# Altium PCB SPT3G_LCBoardRev2.PcbDoc (part 3 of 3)
Units mil, origin at the board's own origin, x right, y up, seen from the top; angles counter-clockwise.
Board outline 7216.28 x 1969 mil, 6 copper layers (Top Layer, Signal Layer 1, Internal Plane 1, Internal Plane 2, Signal Layer 2, Bottom Layer), stack 61.6 mil thick; 29 components, 149 nets, 695 pads, 136 vias.
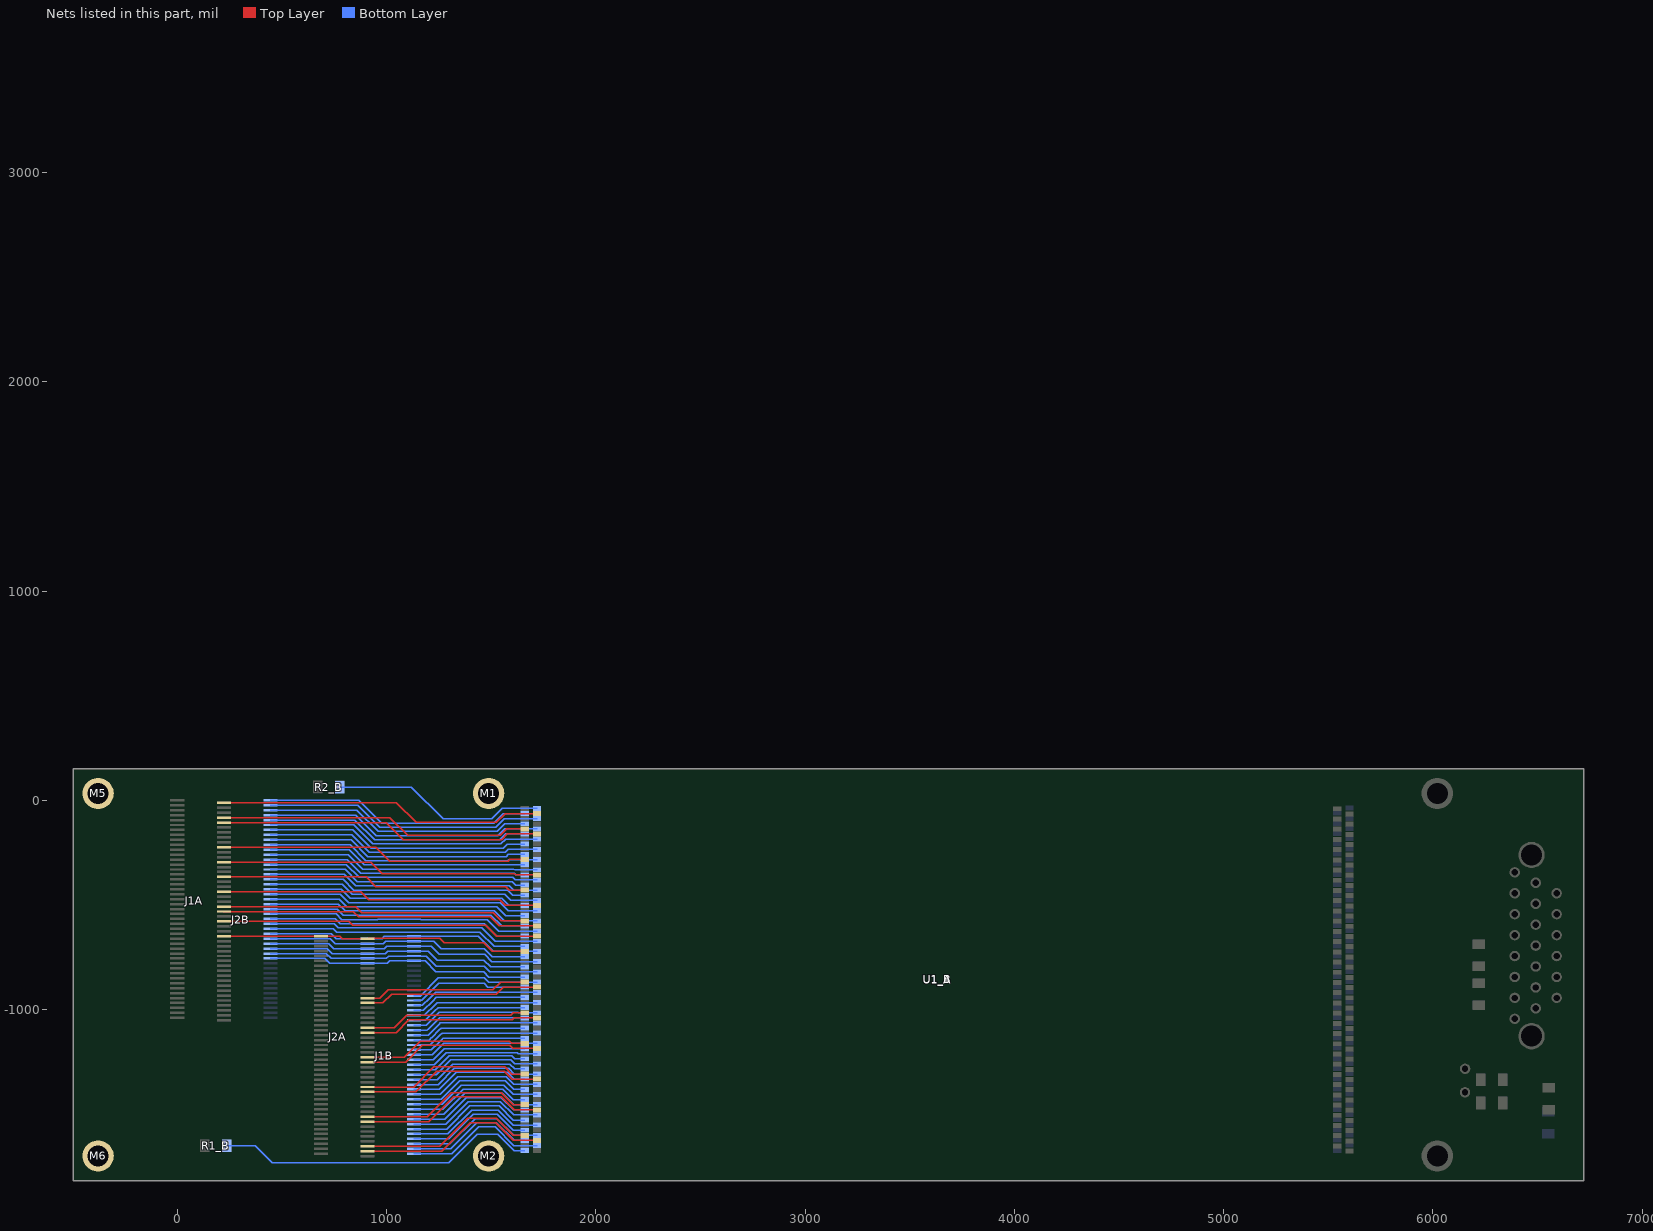
[diagram p7: the nets of this part, all layers, seen from the top]

## Via types
v1: diameter 20, hole 10, Top Layer to Bottom Layer, 136 vias

## Nets (pads, with @x,y where several pads share a name; then routed paths per layer and width w, separated by ;. In a path a pad name is that pad's centre, name@x,y a point inside that pad or via, vN(x,y) a via of type N, cw(c..) or ccw(c..) an arc to the next point about the centre after c; other vN are vias at no path point) (continued)
FREQA45: J1A.10 U1_A.6 | length 1542.1
  Top Layer w6: J1A.10@222.44,-106.3 999.23,-106.3 1081,-188.07 1462,-188.07 ; 1630,-160.87 U1_A.6@1719.4,-160.87
  Top Layer w6.01: 1462,-188.07 1550.58,-188.07 1577.78,-160.87 1630,-160.87
FREQA46: J2A.28 U1_A.36 | length 842.2
  Top Layer w6: J2A.28@908.43,-968.5 981.37,-968.5 1024.16,-925.71 1462,-925.71 ; 1630,-893.15 U1_A.36@1719.4,-893.15
  Top Layer w6.01: 1462,-925.71 1524.12,-925.71 1556.67,-893.15 1630,-893.15
FREQA47: J2A.40 U1_A.42 | length 840.2
  Top Layer w6: J2A.40@908.43,-1110.24 1045.4,-1110.24 1106.99,-1048.65 1462,-1048.65 ; 1630,-1039.61 U1_A.42@1719.4,-1039.61
  Top Layer w6.01: 1462,-1048.65 1600.76,-1048.65 1609.8,-1039.61 1630,-1039.61
FREQA48: J1A.38 U1_A.20 | length 1524.1
  Top Layer w6: J1A.38@222.44,-437.01 877.8,-437.01 915.72,-474.93 1462,-474.93 ; 1630,-502.6 U1_A.20@1719.4,-502.6
  Top Layer w6.01: 1462,-474.93 1539.85,-474.93 1567.53,-502.6 1630,-502.6
FREQA49: J2A.52 U1_A.48 | length 850.3
  Top Layer w6: J2A.52@908.43,-1251.97 1090.9,-1251.97 1171.28,-1171.59 1462,-1171.59 ; 1630,-1186.07 U1_A.48@1719.4,-1186.07
  Top Layer w6.01: 1462,-1171.59 1588.38,-1171.59 1602.86,-1186.07 1630,-1186.07
FREQA50: J1A.46 U1_A.24 | length 1525.4
  Top Layer w6: J1A.46@222.44,-531.5 841.68,-531.5 867.07,-556.89 1462,-556.89 ; 1630,-600.24 U1_A.24@1719.4,-600.24
  Top Layer w6.01: 1462,-556.89 1495.82,-556.89 1539.17,-600.24 1630,-600.24
FREQA51: J1A.2@222.44,-11.81 U1_A.2 | length 1553.8
  Top Layer w6: J1A.2@222.44,-11.81 1047.08,-11.81 1141.38,-106.11 1462,-106.11 ; 1630,-63.23 U1_A.2@1719.4,-63.23
  Top Layer w6.01: 1462,-106.11 1523.73,-106.11 1566.6,-63.23 1630,-63.23
FREQA52: J2A.64 U1_A.54 | length 867.8
  Top Layer w6: J2A.64@908.43,-1393.7 1139.65,-1393.7 1238.82,-1294.53 1462,-1294.53 ; 1630,-1332.52 U1_A.54@1719.4,-1332.52
  Top Layer w6.01: 1462,-1294.53 1563.3,-1294.53 1601.3,-1332.52 1630,-1332.52
FREQA53: J1A.50 U1_A.26 | length 1526.1
  Top Layer w6: J1A.50@222.44,-578.74 819.15,-578.74 837.99,-597.58 1462.35,-597.58 ; 1630,-649.06 U1_A.26@1719.4,-649.06
  Top Layer w6.01: 1462.35,-597.58 1474.23,-597.58 1525.71,-649.06 1630,-649.06
FREQA54: J2A.86 U1_A.65 | length 840.9
  Top Layer w6: J2A.86@908.43,-1653.54 1255.06,-1653.54 1388.67,-1519.92 1462,-1519.92 ; 1630,-1601.03 U1_A.65@1660.35,-1601.03
  Top Layer w6.01: 1462,-1519.92 1525.11,-1519.92 1606.21,-1601.03 1630,-1601.03
FREQA55: J1A.56 J2A.1 J2A.2@908.43,-661.42 U1_A.29 | length 1469.7
  Top Layer w6: J1A.56@222.44,-649.61 777.32,-649.61 789.13,-661.42 J2A.2@908.43,-661.42 910.5,-659.34 1254.06,-659.34 1275.57,-680.85 1462.35,-680.85 ; 1630,-722.29 U1_A.29@1660.35,-722.29
  Top Layer w6.01: 1462.35,-680.85 1463.72,-680.85 1505.16,-722.29 1630,-722.29
FREQA56: J2A.74 U1_A.59 | length 823.3
  Top Layer w6: J2A.74@908.43,-1511.81 1193.54,-1511.81 1308.37,-1396.98 1462,-1396.98 ; 1630,-1454.57 U1_A.59@1660.35,-1454.57
  Top Layer w6.01: 1462,-1396.98 1547.52,-1396.98 1605.11,-1454.57 1630,-1454.57
FREQA57: J2A.76 U1_A.60 | length 885.3
  Top Layer w6: J2A.76@908.43,-1535.43 1202.6,-1535.43 1320.56,-1417.47 1462,-1417.47 ; 1630,-1478.98 U1_A.60@1719.4,-1478.98
  Top Layer w6.01: 1462,-1417.47 1549.34,-1417.47 1610.85,-1478.98 1630,-1478.98
FREQA58: J1A.20 U1_A.11 | length 1468.4
  Top Layer w6: J1A.20@222.44,-224.41 949.38,-224.41 1015.49,-290.52 1462,-290.52 ; 1630,-282.92 U1_A.11@1660.35,-282.92
  Top Layer w6.01: 1462,-290.52 1582,-290.52 1589.6,-282.92 1630,-282.92
FREQA59: J1A.26 U1_A.14 | length 1522.2
  Top Layer w6: J1A.26@222.44,-295.28 923.46,-295.28 980.17,-351.99 1462,-351.99 ; 1630,-356.15 U1_A.14@1719.4,-356.15
  Top Layer w6.01: 1462,-351.99 1611.63,-351.99 1615.79,-356.15 1630,-356.15
FREQA60: J2A.50 U1_A.47 | length 788.3
  Top Layer w6: J2A.50@908.43,-1228.35 1084.52,-1228.35 1161.77,-1151.1 1462,-1151.1 ; 1630,-1161.66 U1_A.47@1660.35,-1161.66
  Top Layer w6.01: 1462,-1151.1 1587.01,-1151.1 1597.56,-1161.66 1630,-1161.66
FREQA61: J1A.32 U1_A.17 | length 1464.1
  Top Layer w6: J1A.32@222.44,-366.14 902.34,-366.14 949.66,-413.46 1462,-413.46 ; 1630,-429.37 U1_A.17@1660.35,-429.37
  Top Layer w6.01: 1462,-413.46 1570.02,-413.46 1585.93,-429.37 1630,-429.37
FREQA62: J2A.38 U1_A.41 | length 781.5
  Top Layer w6: J2A.38@908.43,-1086.61 1037.28,-1086.61 1095.73,-1028.16 1462,-1028.16 ; 1630,-1015.2 U1_A.41@1660.35,-1015.2
  Top Layer w6.01: 1462,-1028.16 1593.69,-1028.16 1606.65,-1015.2 1630,-1015.2
FREQA63: J2A.62 U1_A.53 | length 805.8
  Top Layer w6: J2A.62@908.43,-1370.08 1130.79,-1370.08 1226.83,-1274.04 1462,-1274.04 ; 1630,-1308.11 U1_A.53@1660.35,-1308.11
  Top Layer w6.01: 1462,-1274.04 1564.15,-1274.04 1598.22,-1308.11 1630,-1308.11
FREQA64: J2A.88 U1_A.66 | length 902.8
  Top Layer w6: J2A.88@908.43,-1677.17 1263.37,-1677.17 1400.12,-1540.41 1462,-1540.41 ; 1630,-1625.44 U1_A.66@1719.4,-1625.44
  Top Layer w6.01: 1462,-1540.41 1521.59,-1540.41 1606.62,-1625.44 1630,-1625.44
FREQA65: J1A.8 U1_A.5 | length 1718
  Top Layer w6: J1A.8@222.44,-82.68 1015.8,-82.68 1100.7,-167.58 1230,-167.58 ; 1630,-136.46 U1_A.5@1660.35,-136.46 ; 1230,-167.58 1462,-167.58 1230,-167.58
  Top Layer w6.01: 1462,-167.58 1543.15,-167.58 1574.27,-136.46 1630,-136.46
FREQA66: J1A.44 U1_A.23 | length 1466.1
  Top Layer w6: J1A.44@222.44,-507.87 852.66,-507.87 881.19,-536.4 1462,-536.4 ; 1630,-575.83 U1_A.23@1660.35,-575.83
  Top Layer w6.01: 1462,-536.4 1509.69,-536.4 1549.12,-575.83 1630,-575.83
FREQA67: J2A.26 U1_A.35 | length 783.5
  Top Layer w6: J2A.26@908.43,-944.88 967.64,-944.88 1007.3,-905.22 1462,-905.22 ; 1630,-868.74 U1_A.35@1660.35,-868.74
  Top Layer w6.01: 1462,-905.22 1508.6,-905.22 1545.08,-868.74 1630,-868.74
FREQB0: J2B.46 U1_B.45 | length 1249
  Bottom Layer w6: J2B.46@444.88,-519.69 764.99,-519.69 794.2,-548.9 1482.39,-548.9 ; 1630.09,-600.35 U1_B.45@1660.44,-600.35
  Bottom Layer w6.01: 1482.39,-548.9 1498.66,-548.9 1550.1,-600.35 1630.09,-600.35
FREQB1: J1B.89 J1B.90 J2B.36 U1_B.40 | length 1320.9
  Bottom Layer w6: J2B.36@444.88,-637.8 735.94,-637.8 759.56,-661.42 J1B.89@908.43,-661.42 ; J1B.89@910.5,-659.34 J1B.89@908.43,-661.42 ; J1B.90@1130.87,-649.61 1129.63,-650.84 989.23,-650.84 978.66,-661.42 J1B.89@908.43,-661.42 ; J1B.90@1131.91,-650.65 1245.37,-650.65 ; 1630.09,-722.39 U1_B.40@1719.5,-722.39
  Bottom Layer w6.01: 1245.37,-650.65 1437.75,-650.65 1509.5,-722.39 1630.09,-722.39
FREQB2: J1B.24 U1_B.13 | length 583.1
  Bottom Layer w6: J1B.24@1130.87,-1429.13 1260.42,-1429.13 1348.86,-1340.7 ; 1630.09,-1381.45 U1_B.13@1660.44,-1381.45
  Bottom Layer w6.01: 1348.86,-1340.7 1566.83,-1340.7 1607.58,-1381.45 1630.09,-1381.45
FREQB3: J1B.52 U1_B.27 | length 553.9
  Bottom Layer w6: J1B.52@1130.87,-1098.43 1194.54,-1098.43 1198.17,-1094.8 1198.77,-1094.8 1251.9,-1041.68 ; 1630.09,-1039.72 U1_B.27@1660.44,-1039.72
  Bottom Layer w6.01: 1251.9,-1041.68 1253.86,-1039.72 1630.09,-1039.72
FREQB4: J1B.64 U1_B.33 | length 570.9
  Bottom Layer w6: J1B.64@1130.87,-956.69 1167.18,-956.69 1248.73,-875.14 ; 1630.09,-893.26 U1_B.33@1660.44,-893.26
  Bottom Layer w6.01: 1248.73,-875.14 1466.09,-875.14 1484.21,-893.26 1630.09,-893.26
FREQB5: J2B.72 U1_B.58 | length 1308.7
  Bottom Layer w6: J2B.72@444.88,-212.6 825.59,-212.6 901.9,-288.9 1482.39,-288.9 ; 1630.09,-283.02 U1_B.58@1719.5,-283.02
  Bottom Layer w6.01: 1482.39,-288.9 1577.54,-288.9 1583.42,-283.02 1630.09,-283.02
FREQB6: J1B.30 U1_B.16 | length 632.2
  Bottom Layer w6: J1B.30@1130.87,-1358.27 1246.43,-1358.27 1324,-1280.7 ; 1630.09,-1308.22 U1_B.16@1719.5,-1308.22
  Bottom Layer w6.01: 1324,-1280.7 1583.74,-1280.7 1611.26,-1308.22 1630.09,-1308.22
FREQB7: J2B.84 U1_B.64 | length 1328.6
  Bottom Layer w6: J2B.84@444.88,-70.87 853.57,-70.87 951.6,-168.9 1482.39,-168.9 ; 1630.09,-136.57 U1_B.64@1719.5,-136.57
  Bottom Layer w6.01: 1482.39,-168.9 1532.31,-168.9 1564.65,-136.57 1630.09,-136.57
FREQB8: J1B.4 U1_B.3 | length 616.4
  Bottom Layer w6: J1B.4@1130.87,-1665.35 1307.04,-1665.35 1431.7,-1540.7 ; 1630.09,-1625.54 U1_B.3@1660.44,-1625.54
  Bottom Layer w6.01: 1431.7,-1540.7 1524.26,-1540.7 1609.11,-1625.54 1630.09,-1625.54
FREQB9: J1B.16 U1_B.9 | length 596.4
  Bottom Layer w6: J1B.16@1130.87,-1523.62 1279.07,-1523.62 1381.99,-1420.7 ; 1630.09,-1479.09 U1_B.9@1660.44,-1479.09
  Bottom Layer w6.01: 1381.99,-1420.7 1548.94,-1420.7 1607.33,-1479.09 1630.09,-1479.09
FREQB10: J2B.78 U1_B.61 | length 1259.6
  Bottom Layer w6: J2B.78@444.88,-141.73 839.58,-141.73 926.75,-228.9 1482.39,-228.9 ; 1630.09,-209.8 U1_B.61@1660.44,-209.8
  Bottom Layer w6.01: 1482.39,-228.9 1557.54,-228.9 1576.64,-209.8 1630.09,-209.8
FREQB11: J1B.83 J1B.84 J2B.30 U1_B.37 | length 1261.4
  Bottom Layer w6: J2B.30@444.88,-708.66 717.5,-708.66 741.12,-732.28 J1B.83@908.43,-732.28 993.12,-732.28 1004.93,-720.47 J1B.84@1130.87,-720.47 1199.42,-720.47 1243.06,-764.12 ; 1630.09,-795.62 U1_B.37@1660.44,-795.62
  Bottom Layer w6.01: 1243.06,-764.12 1465.32,-764.12 1496.82,-795.62 1630.09,-795.62
FREQB12: J1B.12 U1_B.7 | length 603
  Bottom Layer w6: J1B.12@1130.87,-1570.87 1288.39,-1570.87 1398.56,-1460.7 ; 1630.09,-1527.91 U1_B.7@1660.44,-1527.91
  Bottom Layer w6.01: 1398.56,-1460.7 1537.85,-1460.7 1605.05,-1527.91 1630.09,-1527.91
FREQB13: J1B.36 U1_B.19 | length 563.1
  Bottom Layer w6: J1B.36@1130.87,-1287.4 1232.45,-1287.4 1299.15,-1220.7 ; 1630.09,-1234.99 U1_B.19@1660.44,-1234.99
  Bottom Layer w6.01: 1299.15,-1220.7 1599.32,-1220.7 1613.62,-1234.99 1630.09,-1234.99
FREQB14: J2B.42 U1_B.43 | length 1249.2
  Bottom Layer w6: J2B.42@444.88,-566.93 755.66,-566.93 778.56,-589.83 965.39,-589.83 ; 965.61,-589.61 1155.72,-589.61 ; 1155.94,-589.83 1326.98,-589.83 ; 1630.09,-649.17 U1_B.43@1660.44,-649.17
  Bottom Layer w6.01: 1326.98,-589.83 1466.41,-589.83 1525.75,-649.17 1630.09,-649.17
FREQB15: J2B.54 U1_B.49 | length 1247.7
  Bottom Layer w6: J2B.54@444.88,-425.2 783.63,-425.2 827.34,-468.9 1482.39,-468.9 ; 1630.09,-502.71 U1_B.49@1660.44,-502.71
  Bottom Layer w6.01: 1482.39,-468.9 1549.99,-468.9 1583.79,-502.71 1630.09,-502.71
FREQB16: J1B.40 U1_B.21 | length 551.9
  Bottom Layer w6: J1B.40@1130.87,-1240.16 1222.52,-1240.16 1247.87,-1214.8 ; 1630.09,-1186.17 U1_B.21@1660.44,-1186.17
  Bottom Layer w6.01: 1247.87,-1214.8 1276.5,-1186.17 1630.09,-1186.17
FREQB17: J2B.66 U1_B.55 | length 1245.7
  Bottom Layer w6: J2B.66@444.88,-283.46 811.61,-283.46 877.05,-348.9 1482.39,-348.9 ; 1630.09,-356.25 U1_B.55@1660.44,-356.25
  Bottom Layer w6.01: 1482.39,-348.9 1609.81,-348.9 1617.16,-356.25 1630.09,-356.25
FREQB18: J1B.48 U1_B.25 | length 553.2
  Bottom Layer w6: J1B.48@1130.87,-1145.67 1203.87,-1145.67 1214.73,-1134.8 1215.34,-1134.8 1252.96,-1097.19 ; 1630.09,-1088.54 U1_B.25@1660.44,-1088.54
  Bottom Layer w6.01: 1252.96,-1097.19 1261.61,-1088.54 1630.09,-1088.54
FREQB19: J1B.60 U1_B.31 | length 555.2
  Bottom Layer w6: J1B.60@1130.87,-1003.94 1176.5,-1003.94 1220.87,-959.57 ; 1630.09,-942.08 U1_B.31@1660.44,-942.08
  Bottom Layer w6.01: 1220.87,-959.57 1238.36,-942.08 1630.09,-942.08
FREQB20: J2B.90 U1_B.67 | length 1279.5
  Bottom Layer w6: J2B.90@444.88,0 867.55,0 976.46,-108.9 1482.39,-108.9 ; 1630.09,-63.34 U1_B.67@1660.44,-63.34
  Bottom Layer w6.01: 1482.39,-108.9 1511.99,-108.9 1557.56,-63.34 1630.09,-63.34
FREQB21: J2B.58 U1_B.51 | length 1247
  Bottom Layer w6: J2B.58@444.88,-377.95 792.96,-377.95 843.91,-428.9 1482.39,-428.9 ; 1630.09,-453.89 U1_B.51@1660.44,-453.89
  Bottom Layer w6.01: 1482.39,-428.9 1578.28,-428.9 1603.27,-453.89 1630.09,-453.89
FREQB22: J1B.6 U1_B.4 | length 672.1
  Bottom Layer w6: J1B.6@1130.87,-1641.73 1302.38,-1641.73 1423.42,-1520.7 ; 1630.09,-1601.14 U1_B.4@1719.5,-1601.14
  Bottom Layer w6.01: 1423.42,-1520.7 1526.85,-1520.7 1607.29,-1601.14 1630.09,-1601.14
FREQB23: J1B.54 U1_B.28 | length 614.4
  Bottom Layer w6: J1B.54@1130.87,-1074.8 1190.49,-1074.8 1251.37,-1013.92 ; 1630.09,-1015.31 U1_B.28@1719.5,-1015.31
  Bottom Layer w6.01: 1251.37,-1013.92 1628.7,-1013.92 1630.09,-1015.31
FREQB24: J1B.18 U1_B.10 | length 652.1
  Bottom Layer w6: J1B.18@1130.87,-1500 1274.41,-1500 1373.71,-1400.7 ; 1630.09,-1454.68 U1_B.10@1719.5,-1454.68
  Bottom Layer w6.01: 1373.71,-1400.7 1553.68,-1400.7 1607.66,-1454.68 1630.09,-1454.68
FREQB25: J1B.28 U1_B.15 | length 576.4
  Bottom Layer w6: J1B.28@1130.87,-1381.89 1251.1,-1381.89 1332.29,-1300.7 ; 1630.09,-1332.63 U1_B.15@1660.44,-1332.63
  Bottom Layer w6.01: 1332.29,-1300.7 1579.54,-1300.7 1611.47,-1332.63 1630.09,-1332.63
FREQB26: J1B.87 J1B.88 J2B.34 U1_B.39 | length 1260.7
  Bottom Layer w6: J2B.34@444.88,-661.42 731.28,-661.42 754.9,-685.04 J1B.87@908.43,-685.04 983.42,-685.04 995.23,-673.23 J1B.88@1130.87,-673.23 1226.41,-673.23 1261.79,-708.61 ; 1630.09,-746.8 U1_B.39@1660.44,-746.8
  Bottom Layer w6.01: 1261.79,-708.61 1467.07,-708.61 1505.27,-746.8 1630.09,-746.8
FREQB27: J2B.82 U1_B.63 | length 1266.2
  Bottom Layer w6: J2B.82@444.88,-94.49 848.91,-94.49 943.32,-188.9 1482.39,-188.9 ; 1630.09,-160.98 U1_B.63@1660.44,-160.98
  Bottom Layer w6.01: 1482.39,-188.9 1541.45,-188.9 1569.38,-160.98 1630.09,-160.98
FREQB28: J1B.66 U1_B.34 | length 633
  Bottom Layer w6: J1B.66@1130.87,-933.07 1162.52,-933.07 1248.2,-847.39 ; 1630.09,-868.85 U1_B.34@1719.5,-868.85
  Bottom Layer w6.01: 1248.2,-847.39 1467.69,-847.39 1489.16,-868.85 1630.09,-868.85
FREQB29: J2B.48 U1_B.46 | length 1307.7
  Bottom Layer w6: J2B.48@444.88,-496.06 769.65,-496.06 802.49,-528.9 1482.39,-528.9 ; 1630.09,-575.94 U1_B.46@1719.5,-575.94
  Bottom Layer w6.01: 1482.39,-528.9 1515.24,-528.9 1562.27,-575.94 1630.09,-575.94
FREQB30: J2B.70 U1_B.57 | length 1244.2
  Bottom Layer w6: J2B.70@444.88,-236.22 820.93,-236.22 893.61,-308.9 1482.39,-308.9 ; 1630.09,-307.43 U1_B.57@1660.44,-307.43
  Bottom Layer w6.01: 1482.39,-308.9 1628.62,-308.9
FREQB31: J1B.42 U1_B.22 | length 611.3
  Bottom Layer w6: J1B.42@1130.87,-1216.54 1217.85,-1216.54 1239.59,-1194.8 ; 1272.62,-1161.77 U1_B.22@1719.5,-1161.77
  Bottom Layer w6.01: 1239.59,-1194.8 1272.62,-1161.77
FREQB32: J2B.60 U1_B.52 | length 1305.7
  Bottom Layer w6: J2B.60@444.88,-354.33 797.62,-354.33 852.19,-408.9 1482.39,-408.9 ; 1630.09,-429.48 U1_B.52@1719.5,-429.48
  Bottom Layer w6.01: 1482.39,-408.9 1586.97,-408.9 1607.55,-429.48 1630.09,-429.48
FREQB33: R1_B.2 U1_B.1 | length 1546
  Bottom Layer w6: R1_B.2@237.39,-1650.63 373.33,-1650.63 454.57,-1731.87 1297.1,-1731.87 1433.61,-1595.35 ; 1630.09,-1674.36 U1_B.1@1660.44,-1674.36
  Bottom Layer w6.01: 1433.61,-1595.35 1530.51,-1595.35 1609.52,-1674.36 1630.09,-1674.36
FREQB34: R2_B.2 U1_B.68 | length 1026.1
  Bottom Layer w6: R2_B.2@777.1,63.2 1119.29,63.2 1271.4,-88.9 ; 1630.09,-38.93 U1_B.68@1719.5,-38.93
  Bottom Layer w6.01: 1271.4,-88.9 1503.65,-88.9 1553.62,-38.93 1630.09,-38.93
FREQB35: J1B.22 U1_B.12 | length 645.5
  Bottom Layer w6: J1B.22@1130.87,-1452.76 1265.08,-1452.76 1357.14,-1360.7 ; 1630.09,-1405.86 U1_B.12@1719.5,-1405.86
  Bottom Layer w6.01: 1357.14,-1360.7 1560.47,-1360.7 1605.63,-1405.86 1630.09,-1405.86
FREQB36: J1B.85 J1B.86 J2B.32 U1_B.38 | length 1320.1
  Bottom Layer w6: J2B.32@444.88,-685.04 723.17,-685.04 746.79,-708.66 J1B.85@908.43,-708.66 988.46,-708.66 1000.27,-696.85 1213.1,-696.85 1252.61,-736.36 ; 1630.09,-771.21 U1_B.38@1719.5,-771.21
  Bottom Layer w6.01: 1252.61,-736.36 1469.06,-736.36 1503.91,-771.21 1630.09,-771.21
FREQB37: J1B.34 U1_B.18 | length 625.5
  Bottom Layer w6: J1B.34@1130.87,-1311.02 1237.11,-1311.02 1307.44,-1240.7 ; 1630.09,-1259.4 U1_B.18@1719.5,-1259.4
  Bottom Layer w6.01: 1307.44,-1240.7 1594.23,-1240.7 1612.94,-1259.4 1630.09,-1259.4
FREQB38: J2B.44 U1_B.44 | length 1308.5
  Bottom Layer w6: J2B.44@444.88,-543.31 760.32,-543.31 786.84,-569.83 957.11,-569.83 957.33,-569.61 1164,-569.61 1164.22,-569.83 1482.39,-569.83 ; 1630.09,-624.76 U1_B.44@1719.5,-624.76
  Bottom Layer w6.01: 1482.39,-569.83 1537.32,-624.76 1630.09,-624.76
FREQB39: J1B.14 U1_B.8 | length 658.8
  Bottom Layer w6: J1B.14@1130.87,-1547.24 1283.73,-1547.24 1390.28,-1440.7 ; 1630.09,-1503.5 U1_B.8@1719.5,-1503.5
  Bottom Layer w6.01: 1390.28,-1440.7 1544.2,-1440.7 1607,-1503.5 1630.09,-1503.5
FREQB40: J1B.62 U1_B.32 | length 614.6
  Bottom Layer w6: J1B.62@1130.87,-980.31 1171.84,-980.31 1206.72,-945.43 ; 1630.09,-917.67 U1_B.32@1719.5,-917.67
  Bottom Layer w6.01: 1206.72,-945.43 1234.48,-917.67 1630.09,-917.67
FREQB41: J2B.68 U1_B.56 | length 1304.4
  Bottom Layer w6: J2B.68@444.88,-259.84 816.27,-259.84 885.33,-328.9 1482.39,-328.9 ; 1630.09,-331.84 U1_B.56@1719.5,-331.84
  Bottom Layer w6.01: 1482.39,-328.9 1608.8,-328.9 1611.74,-331.84 1630.09,-331.84
FREQB42: J2B.80 U1_B.62 | length 1322
  Bottom Layer w6: J2B.80@444.88,-118.11 844.24,-118.11 935.04,-208.9 1482.39,-208.9 ; 1630.09,-185.39 U1_B.62@1719.5,-185.39
  Bottom Layer w6.01: 1482.39,-208.9 1546.42,-208.9 1569.94,-185.39 1630.09,-185.39
FREQB43: J1B.58 U1_B.30 | length 613.9
  Bottom Layer w6: J1B.58@1130.87,-1027.56 1181.16,-1027.56 1235.01,-973.71 ; 1630.09,-966.49 U1_B.30@1719.5,-966.49
  Bottom Layer w6.01: 1235.01,-973.71 1242.23,-966.49 1630.09,-966.49
FREQB44: J2B.56 U1_B.50 | length 1306.4
  Bottom Layer w6: J2B.56@444.88,-401.57 788.3,-401.57 835.63,-448.9 1482.39,-448.9 ; 1630.09,-478.3 U1_B.50@1719.5,-478.3
  Bottom Layer w6.01: 1482.39,-448.9 1563.93,-448.9 1593.33,-478.3 1630.09,-478.3
FREQB45: J1B.10 U1_B.6 | length 665.4
  Bottom Layer w6: J1B.10@1130.87,-1594.49 1293.06,-1594.49 1406.85,-1480.7 ; 1630.09,-1552.32 U1_B.6@1719.5,-1552.32
  Bottom Layer w6.01: 1406.85,-1480.7 1534.18,-1480.7 1605.8,-1552.32 1630.09,-1552.32
FREQB46: J1B.81 J1B.82 J2B.28 U1_B.36 | length 1320.7
  Bottom Layer w6: J2B.28@444.88,-732.28 712.33,-732.28 735.95,-755.91 997.78,-755.91 1009.59,-744.09 1190.45,-744.09 1238.23,-791.87 ; 1630.09,-820.03 U1_B.36@1719.5,-820.03
  Bottom Layer w6.01: 1238.23,-791.87 1465.87,-791.87 1494.03,-820.03 1630.09,-820.03
FREQB47: J2B.40 U1_B.42 | length 1308.9
  Bottom Layer w6: J2B.40@444.88,-590.55 751,-590.55 770.28,-609.83 973.68,-609.83 973.9,-609.61 1147.43,-609.61 ; 1147.66,-609.83 1301.54,-609.83 ; 1630.09,-673.58 U1_B.42@1719.5,-673.58
  Bottom Layer w6.01: 1301.54,-609.83 1454.91,-609.83 1518.66,-673.58 1630.09,-673.58
FREQB48: J1B.38 U1_B.20 | length 614.6
  Bottom Layer w6: J1B.38@1130.87,-1263.78 1227.18,-1263.78 1256.16,-1234.8 ; 1630.09,-1210.58 U1_B.20@1719.5,-1210.58
  Bottom Layer w6.01: 1256.16,-1234.8 1285.14,-1205.82 1625.33,-1205.82 1630.09,-1210.58
FREQB49: J2B.52 U1_B.48 | length 1307
  Bottom Layer w6: J2B.52@444.88,-448.82 778.97,-448.82 819.06,-488.9 1482.39,-488.9 ; 1630.09,-527.12 U1_B.48@1719.5,-527.12
  Bottom Layer w6.01: 1482.39,-488.9 1542.51,-488.9 1580.73,-527.12 1630.09,-527.12
FREQB50: J1B.46 U1_B.24 | length 612
  Bottom Layer w6: J1B.46@1130.87,-1169.29 1208.53,-1169.29 1223.02,-1154.8 1223.63,-1154.8 1257.73,-1120.7 ; 1630.09,-1112.95 U1_B.24@1719.5,-1112.95
  Bottom Layer w6.01: 1257.73,-1120.7 1265.48,-1112.95 1630.09,-1112.95
FREQB51: J1B.2@1130.87,-1688.98 U1_B.2 | length 678.7
  Bottom Layer w6: J1B.2@1130.87,-1688.98 1311.71,-1688.98 1439.98,-1560.7 ; 1630.09,-1649.95 U1_B.2@1719.5,-1649.95
  Bottom Layer w6.01: 1439.98,-1560.7 1519.52,-1560.7 1608.78,-1649.95 1630.09,-1649.95
FREQB52: J2B.64 U1_B.54 | length 1305.1
  Bottom Layer w6: J2B.64@444.88,-307.09 806.95,-307.09 868.76,-368.9 1482.39,-368.9 ; 1630.09,-380.66 U1_B.54@1719.5,-380.66
  Bottom Layer w6.01: 1482.39,-368.9 1603.54,-368.9 1615.3,-380.66 1630.09,-380.66
FREQB53: J1B.50 U1_B.26 | length 612.6
  Bottom Layer w6: J1B.50@1130.87,-1122.05 1199.21,-1122.05 1206.45,-1114.8 1207.06,-1114.8 1252.43,-1069.43 ; 1630.09,-1064.13 U1_B.26@1719.5,-1064.13
  Bottom Layer w6.01: 1252.43,-1069.43 1257.73,-1064.13 1630.09,-1064.13
FREQB54: J2B.86 U1_B.65 | length 1272.9
  Bottom Layer w6: J2B.86@444.88,-47.24 858.23,-47.24 959.89,-148.9 1482.39,-148.9 ; 1630.09,-112.16 U1_B.65@1660.44,-112.16
  Bottom Layer w6.01: 1482.39,-148.9 1528.69,-148.9 1565.44,-112.16 1630.09,-112.16
FREQB55: J1B.56 U1_B.29 | length 554.5
  Bottom Layer w6: J1B.56@1130.87,-1051.18 1185.83,-1051.18 1231.43,-1005.57 ; 1630.09,-990.9 U1_B.29@1660.44,-990.9
  Bottom Layer w6.01: 1231.43,-1005.57 1246.11,-990.9 1630.09,-990.9
FREQB56: J2B.74 U1_B.59 | length 1252.9
  Bottom Layer w6: J2B.74@444.88,-188.98 830.26,-188.98 910.18,-268.9 1482.39,-268.9 ; 1630.09,-258.62 U1_B.59@1660.44,-258.62
  Bottom Layer w6.01: 1482.39,-268.9 1572.09,-268.9 1582.38,-258.62 1630.09,-258.62
FREQB57: J2B.76 U1_B.60 | length 1315.3
  Bottom Layer w6: J2B.76@444.88,-165.35 834.92,-165.35 918.47,-248.9 1482.39,-248.9 ; 1630.09,-234.21 U1_B.60@1719.5,-234.21
  Bottom Layer w6.01: 1482.39,-248.9 1566.23,-248.9 1580.92,-234.21 1630.09,-234.21
FREQB58: J1B.20 U1_B.11 | length 589.7
  Bottom Layer w6: J1B.20@1130.87,-1476.38 1269.75,-1476.38 1365.43,-1380.7 ; 1630.09,-1430.27 U1_B.11@1660.44,-1430.27
  Bottom Layer w6.01: 1365.43,-1380.7 1555.73,-1380.7 1605.3,-1430.27 1630.09,-1430.27
FREQB59: J1B.26 U1_B.14 | length 638.8
  Bottom Layer w6: J1B.26@1130.87,-1405.51 1255.76,-1405.51 1340.57,-1320.7 ; 1630.09,-1357.04 U1_B.14@1719.5,-1357.04
  Bottom Layer w6.01: 1340.57,-1320.7 1571.03,-1320.7 1607.37,-1357.04 1630.09,-1357.04
FREQB60: J2B.50 U1_B.47 | length 1248.3
  Bottom Layer w6: J2B.50@444.88,-472.44 774.31,-472.44 810.77,-508.9 1482.39,-508.9 ; 1630.09,-551.53 U1_B.47@1660.44,-551.53
  Bottom Layer w6.01: 1482.39,-508.9 1526.14,-508.9 1568.77,-551.53 1630.09,-551.53
FREQB61: J1B.32 U1_B.17 | length 569.8
  Bottom Layer w6: J1B.32@1130.87,-1334.65 1241.77,-1334.65 1315.72,-1260.7 ; 1630.09,-1283.81 U1_B.17@1660.44,-1283.81
  Bottom Layer w6.01: 1315.72,-1260.7 1589.55,-1260.7 1612.67,-1283.81 1630.09,-1283.81
FREQB62: J2B.38 U1_B.41 | length 1250.1
  Bottom Layer w6: J2B.38@444.88,-614.17 746.34,-614.17 761.99,-629.83 981.96,-629.83 982.18,-629.61 1139.15,-629.61 ; 1139.37,-629.83 1276.09,-629.83 ; 1630.09,-697.99 U1_B.41@1660.44,-697.99
  Bottom Layer w6.01: 1276.09,-629.83 1446.28,-629.83 1514.44,-697.99 1630.09,-697.99
FREQB63: J2B.62 U1_B.53 | length 1246.4
  Bottom Layer w6: J2B.62@444.88,-330.71 802.28,-330.71 860.48,-388.9 1482.39,-388.9 ; 1630.09,-405.07 U1_B.53@1660.44,-405.07
  Bottom Layer w6.01: 1482.39,-388.9 1600.91,-388.9 1617.08,-405.07 1630.09,-405.07
FREQB64: J2B.88 U1_B.66 | length 1335.3
  Bottom Layer w6: J2B.88@444.88,-23.62 862.89,-23.62 968.17,-128.9 1482.39,-128.9 ; 1630.09,-87.75 U1_B.66@1719.5,-87.75
  Bottom Layer w6.01: 1482.39,-128.9 1521.13,-128.9 1562.28,-87.75 1630.09,-87.75
FREQB65: J1B.8 U1_B.5 | length 609.7
  Bottom Layer w6: J1B.8@1130.87,-1618.11 1297.72,-1618.11 1415.13,-1500.7 ; 1630.09,-1576.73 U1_B.5@1660.44,-1576.73
  Bottom Layer w6.01: 1415.13,-1500.7 1528.36,-1500.7 1604.39,-1576.73 1630.09,-1576.73
FREQB66: J1B.44 U1_B.23 | length 552.6
  Bottom Layer w6: J1B.44@1130.87,-1192.91 1213.19,-1192.91 1231.3,-1174.8 1231.91,-1174.8 1266.02,-1140.7 ; 1630.09,-1137.36 U1_B.23@1660.44,-1137.36
  Bottom Layer w6.01: 1266.02,-1140.7 1269.36,-1137.36 1630.09,-1137.36
FREQB67: J1B.79 J1B.80 J2B.26 U1_B.35 | length 1262
  Bottom Layer w6: J2B.26@444.88,-755.91 704.13,-755.91 727.75,-779.53 J1B.79@908.43,-779.53 1004.43,-779.53 1016.24,-767.72 J1B.80@1130.87,-767.72 1184.37,-767.72 1236.29,-819.63 ; 1630.09,-844.44 U1_B.35@1660.44,-844.44
  Bottom Layer w6.01: 1236.29,-819.63 1463.56,-819.63 1488.37,-844.44 1630.09,-844.44
GND: M1.0 M2.0 M5.0 M6.0
pads on no net: J1.1 J1.2 J1.3 J1.4 J1.5 J1.6 J1.9 J1.10 J1.11 J1.12 J1.13 J1.14 J1.15 J1.16 J1.17 J1.20 J1.21 J1.MH1 J1.MH2 J1A.2@-61.02,90.55 J1A.67 J1A.68 J1A.69 J1A.70 J1A.71 J1A.72 J1A.73 J1A.74 J1A.75 J1A.76 J1A.77 J1A.78 J1A.79 J1A.80 J1A.81 J1A.82 J1A.83 J1A.84 J1A.85 J1A.86 J1A.87 J1A.88 J1A.89 J1A.90 J1B.2@847.4,-1791.34 J1B.67 J1B.68 J1B.69 J1B.70 J1B.71 J1B.72 J1B.73 J1B.74 J1B.75 J1B.76 J1B.77 J1B.78 J2A.2@624.96,-559.06 J2A.13 J2A.14 J2A.15 J2A.16 J2A.17 J2A.18 J2A.19 J2A.20 J2A.21 J2A.22 J2A.23 J2A.24 J2B.1 J2B.2 J2B.3 J2B.4 J2B.5 J2B.6 J2B.7 J2B.8 J2B.9 J2B.10 J2B.11 J2B.12 J2B.13 J2B.14 J2B.15 J2B.16 J2B.17 J2B.18 J2B.19 J2B.20 J2B.21 J2B.22 J2B.23 J2B.24 M3.0 M4.0

## Polygon pours and split planes (outlines as drawn)
COMB_A on Top Layer "Top Layer-No Net" (solid, pour order 11): 5632.04,-1675.33 ccw(c5705.99,-1645.35) 5735.97,-1719.31 5736.22,-1719.63 ccw(c5088.38,-858.01) 5736.22,3.61 5735.97,3.28 ccw(c5705.99,-70.67) 5632.04,-40.69
BOLORETURN_A on Signal Layer 1 "Top Layer-No Net" (solid, pour order 15): 5632.04,-1675.33 ccw(c5705.99,-1645.35) 5735.97,-1719.31 5736.22,-1719.63 ccw(c5088.38,-858.01) 5736.22,3.61 5735.97,3.28 ccw(c5705.99,-70.67) 5632.04,-40.69
BOLORETURN_B on Signal Layer 2 "Top Layer-No Net" (solid, pour order 13): 5632.04,-1675.33 ccw(c5705.99,-1645.35) 5735.97,-1719.31 5736.22,-1719.63 ccw(c5088.38,-858.01) 5736.22,3.61 5735.97,3.28 ccw(c5705.99,-70.67) 5632.04,-40.69
COMB_B on Bottom Layer "Top Layer-No Net" (solid): 5632.04,-1675.33 ccw(c5705.99,-1645.35) 5735.97,-1719.31 5736.22,-1719.63 ccw(c5088.38,-858.01) 5736.22,3.61 5735.97,3.28 ccw(c5705.99,-70.67) 5632.04,-40.69
GND on Internal Plane 1 (split plane): 6699.8,-1798.41 -476.28,-1798.41 -476.28,130.4 6699.8,130.4
GND on Internal Plane 2 (split plane): 6699.8,-1798.41 -476.28,-1798.41 -476.28,130.4 6699.8,130.4

## Keep-outs
Keep-Out Layer:
  lines w1: 2238.61,378.44 3489.25,1629.08 ; 2238.61,438.44 3429.25,1629.08 ; 2238.61,498.44 3369.25,1629.08 ; 2238.61,558.44 3309.25,1629.08 ; 2238.61,618.44 3249.25,1629.08 ; 2238.61,678.44 3189.25,1629.08 ; 2238.61,738.44 3129.25,1629.08 ; 2238.61,798.44 3069.25,1629.08 ; 2238.61,858.44 3009.25,1629.08 ; 2238.61,918.44 2949.25,1629.08 ; 2238.61,978.44 2889.25,1629.08 ; 2238.61,1038.44 2829.25,1629.08 ; 2238.61,1098.44 2769.25,1629.08 ; 2238.61,1158.44 2709.25,1629.08 ; 2238.61,1218.44 2649.25,1629.08 ; 2238.61,1278.44 2589.25,1629.08 ; 2238.61,1338.44 2529.25,1629.08 ; 2238.61,1398.44 2469.25,1629.08 ; 2238.61,1458.44 2409.25,1629.08 ; 2238.61,1518.44 2349.25,1629.08 ; 2238.61,1578.44 2289.25,1629.08 ; 2266.84,346.67 3549.25,1629.08 ; 2326.84,346.67 3609.25,1629.08 ; 2386.84,346.67 3669.25,1629.08 ; 2446.84,346.67 3729.25,1629.08 ; 2506.84,346.67 3789.25,1629.08 ; 2566.84,346.67 3849.25,1629.08 ; 2626.84,346.67 3909.25,1629.08 ; 2686.84,346.67 3969.25,1629.08 ; 2746.84,346.67 4029.25,1629.08 ; 2806.84,346.67 4089.25,1629.08 ; 2866.84,346.67 4149.25,1629.08 ; 2926.84,346.67 4209.25,1629.08 ; 2986.84,346.67 4269.25,1629.08 ; 3046.84,346.67 4329.25,1629.08 ; 3106.84,346.67 4389.25,1629.08 ; 3166.84,346.67 4449.25,1629.08 ; 3226.84,346.67 4509.25,1629.08 ; 3286.84,346.67 4569.25,1629.08 ; 3346.84,346.67 4629.25,1629.08 ; 3406.84,346.67 4689.25,1629.08 ; 3466.84,346.67 4749.25,1629.08 ; 3526.84,346.67 4809.25,1629.08 ; 3586.84,346.67 4869.25,1629.08 ; 3646.84,346.67 4929.25,1629.08 ; 3706.84,346.67 4989.25,1629.08 ; 3766.84,346.67 5049.25,1629.08 ; 3826.84,346.67 5109.25,1629.08 ; 3886.84,346.67 5169.25,1629.08 ; 3946.84,346.67 5229.25,1629.08 ; 4006.84,346.67 5289.25,1629.08 ; 4066.84,346.67 5349.25,1629.08 ; 4126.84,346.67 5409.25,1629.08 ; 4186.84,346.67 5469.25,1629.08 ; 4246.84,346.67 5529.25,1629.08 ; 4306.84,346.67 5589.25,1629.08 ; 4366.84,346.67 5649.25,1629.08 ; 4426.84,346.67 5709.25,1629.08 ; 4486.84,346.67 5769.25,1629.08 ; 4546.84,346.67 5829.25,1629.08 ; 4606.84,346.67 5889.25,1629.08 ; 4666.84,346.67 5949.25,1629.08 ; 4726.84,346.67 6009.25,1629.08 ; 4786.84,346.67 6069.25,1629.08 ; 4846.84,346.67 6129.25,1629.08 ; 4906.84,346.67 6189.25,1629.08 ; 4966.84,346.67 6249.25,1629.08 ; 5026.84,346.67 6309.25,1629.08 ; 5086.84,346.67 6369.25,1629.08 ; 5146.84,346.67 6429.25,1629.08 ; 5206.84,346.67 6489.25,1629.08 ; 5266.84,346.67 6549.25,1629.08 ; 5326.84,346.67 6609.25,1629.08 ; 5386.84,346.67 6669.25,1629.08 ; 5446.84,346.67 6729.25,1629.08 ; 5506.84,346.67 6789.25,1629.08 ; 5566.84,346.67 6849.25,1629.08 ; 5626.84,346.67 6887.38,1607.21 ; 5686.84,346.67 6887.38,1547.21 ; 5746.84,346.67 6887.38,1487.21 ; 5767.7,1678.86 5867.38,1778.54 5987.38,1898.54 6107.38,2018.54 6227.38,2138.54 6347.38,2258.54 6467.38,2378.54 6587.38,2498.54 6707.38,2618.54 6827.38,2738.54 6887.38,2798.54 ; 5767.7,1738.86 5807.38,1778.54 5927.38,1898.54 6047.38,2018.54 6167.38,2138.54 6287.38,2258.54 6407.38,2378.54 6527.38,2498.54 6647.38,2618.54 6767.38,2738.54 6887.38,2858.54 ; 5767.7,1798.86 5867.38,1898.54 5987.38,2018.54 6107.38,2138.54 6227.38,2258.54 6347.38,2378.54 6467.38,2498.54 6587.38,2618.54 6707.38,2738.54 6827.38,2858.54 6887.38,2918.54 ; 5767.7,1858.86 5807.38,1898.54 5927.38,2018.54 6047.38,2138.54 6167.38,2258.54 6287.38,2378.54 6407.38,2498.54 6527.38,2618.54 6647.38,2738.54 6767.38,2858.54 6887.38,2978.54 ; 5767.7,1918.86 5867.38,2018.54 5987.38,2138.54 6107.38,2258.54 6227.38,2378.54 6347.38,2498.54 6467.38,2618.54 6587.38,2738.54 6707.38,2858.54 6827.38,2978.54 6887.38,3038.54 ; 5767.7,1978.86 5807.38,2018.54 5927.38,2138.54 6047.38,2258.54 6167.38,2378.54 6287.38,2498.54 6407.38,2618.54 6527.38,2738.54 6647.38,2858.54 6767.38,2978.54 6887.38,3098.54 ; 5767.7,2038.86 5867.38,2138.54 5987.38,2258.54 6107.38,2378.54 6227.38,2498.54 6347.38,2618.54 6467.38,2738.54 6587.38,2858.54 6707.38,2978.54 6827.38,3098.54 6887.38,3158.54 ; 5767.7,2098.86 5807.38,2138.54 5927.38,2258.54 6047.38,2378.54 6167.38,2498.54 6287.38,2618.54 6407.38,2738.54 6527.38,2858.54 6647.38,2978.54 6767.38,3098.54 6887.38,3218.54 ; 5767.7,2158.86 5867.38,2258.54 5987.38,2378.54 6107.38,2498.54 6227.38,2618.54 6347.38,2738.54 6467.38,2858.54 6587.38,2978.54 6707.38,3098.54 6827.38,3218.54 6887.38,3278.54 ; 5767.7,2218.86 5807.38,2258.54 5927.38,2378.54 6047.38,2498.54 6167.38,2618.54 6287.38,2738.54 6407.38,2858.54 6527.38,2978.54 6647.38,3098.54 6767.38,3218.54 6887.38,3338.54 ; 5767.7,2278.86 5867.38,2378.54 5987.38,2498.54 6107.38,2618.54 6227.38,2738.54 6347.38,2858.54 6467.38,2978.54 6587.38,3098.54 6707.38,3218.54 6827.38,3338.54 6887.38,3398.54 ; 5767.7,2338.86 5807.38,2378.54 5927.38,2498.54 6047.38,2618.54 6167.38,2738.54 6287.38,2858.54 6407.38,2978.54 6527.38,3098.54 6647.38,3218.54 6767.38,3338.54 6887.38,3458.54 ; 5767.7,2398.86 5867.38,2498.54 5987.38,2618.54 6107.38,2738.54 6227.38,2858.54 6347.38,2978.54 6467.38,3098.54 6587.38,3218.54 6707.38,3338.54 6827.38,3458.54 ; 5767.7,2458.86 5807.38,2498.54 5927.38,2618.54 6047.38,2738.54 6167.38,2858.54 6287.38,2978.54 6407.38,3098.54 6527.38,3218.54 6647.38,3338.54 6767.38,3458.54 ; 5767.7,2518.86 5867.38,2618.54 5987.38,2738.54 6107.38,2858.54 6227.38,2978.54 6347.38,3098.54 6467.38,3218.54 6587.38,3338.54 6707.38,3458.54 ; 5767.7,2578.86 5807.38,2618.54 5927.38,2738.54 6047.38,2858.54 6167.38,2978.54 6287.38,3098.54 6407.38,3218.54 6527.38,3338.54 6647.38,3458.54 ; 5767.7,2638.86 5867.38,2738.54 5987.38,2858.54 6107.38,2978.54 6227.38,3098.54 6347.38,3218.54 6467.38,3338.54 6587.38,3458.54 ; 5767.7,2698.86 5807.38,2738.54 5927.38,2858.54 6047.38,2978.54 6167.38,3098.54 6287.38,3218.54 6407.38,3338.54 6527.38,3458.54 ; 5767.7,2758.86 5867.38,2858.54 5987.38,2978.54 6107.38,3098.54 6227.38,3218.54 6347.38,3338.54 6467.38,3458.54 ; 5767.7,2818.86 5807.38,2858.54 5927.38,2978.54 6047.38,3098.54 6167.38,3218.54 6287.38,3338.54 6407.38,3458.54 ; 5767.7,2878.86 5867.38,2978.54 5987.38,3098.54 6107.38,3218.54 6227.38,3338.54 6347.38,3458.54 ; 5767.7,2938.86 5807.38,2978.54 5927.38,3098.54 6047.38,3218.54 6167.38,3338.54 6287.38,3458.54 ; 5767.7,2998.86 5867.38,3098.54 5987.38,3218.54 6107.38,3338.54 6227.38,3458.54 ; 5767.7,3058.86 5807.38,3098.54 5927.38,3218.54 6047.38,3338.54 6167.38,3458.54 ; 5767.7,3118.86 5867.38,3218.54 5987.38,3338.54 6107.38,3458.54 ; 5767.7,3178.86 5807.38,3218.54 5927.38,3338.54 6047.38,3458.54 ; 5767.7,3238.86 5867.38,3338.54 5987.38,3458.54 ; 5767.7,3298.86 5807.38,3338.54 5927.38,3458.54 ; 5767.7,3358.86 5867.38,3458.54 ; 5767.7,3418.86 5807.38,3458.54 ; 5806.84,346.67 6887.38,1427.21 ; 5807.38,1658.54 5927.38,1778.54 6047.38,1898.54 6167.38,2018.54 6287.38,2138.54 6407.38,2258.54 6527.38,2378.54 6647.38,2498.54 6767.38,2618.54 6887.38,2738.54 ; 5866.84,346.67 6887.38,1367.21 ; 5867.38,1658.54 5987.38,1778.54 6107.38,1898.54 6227.38,2018.54 6347.38,2138.54 6467.38,2258.54 6587.38,2378.54 6707.38,2498.54 6827.38,2618.54 6887.38,2678.54 ; 5926.84,346.67 6887.38,1307.21 ; 5927.38,1658.54 6047.38,1778.54 6167.38,1898.54 6287.38,2018.54 6407.38,2138.54 6527.38,2258.54 6647.38,2378.54 6767.38,2498.54 6887.38,2618.54 ; 5986.84,346.67 6887.38,1247.21 ; 5987.38,1658.54 6107.38,1778.54 6227.38,1898.54 6347.38,2018.54 6467.38,2138.54 6587.38,2258.54 6707.38,2378.54 6827.38,2498.54 6887.38,2558.54 ; 6046.84,346.67 6887.38,1187.21 ; 6047.38,1658.54 6167.38,1778.54 6287.38,1898.54 6407.38,2018.54 6527.38,2138.54 6647.38,2258.54 6767.38,2378.54 6887.38,2498.54 ; 6106.84,346.67 6887.38,1127.21 ; 6107.38,1658.54 6227.38,1778.54 6347.38,1898.54 6467.38,2018.54 6587.38,2138.54 6707.38,2258.54 6827.38,2378.54 6887.38,2438.54 ; 6166.84,346.67 6887.38,1067.21 ; 6167.38,1658.54 6287.38,1778.54 6407.38,1898.54 6527.38,2018.54 6647.38,2138.54 6767.38,2258.54 6887.38,2378.54 ; 6226.84,346.67 6887.38,1007.21 ; 6227.38,1658.54 6347.38,1778.54 6467.38,1898.54 6587.38,2018.54 6707.38,2138.54 6827.38,2258.54 6887.38,2318.54 ; 6286.84,346.67 6887.38,947.21 ; 6287.38,1658.54 6407.38,1778.54 6527.38,1898.54 6647.38,2018.54 6767.38,2138.54 6887.38,2258.54 ; 6346.84,346.67 6887.38,887.21 ; 6347.38,1658.54 6467.38,1778.54 6587.38,1898.54 6707.38,2018.54 6827.38,2138.54 6887.38,2198.54 ; 6406.84,346.67 6887.38,827.21 ; 6407.38,1658.54 6527.38,1778.54 6647.38,1898.54 6767.38,2018.54 6887.38,2138.54 ; 6466.84,346.67 6887.38,767.21 ; 6467.38,1658.54 6587.38,1778.54 6707.38,1898.54 6827.38,2018.54 6887.38,2078.54 ; 6526.84,346.67 6887.38,707.21 ; 6527.38,1658.54 6647.38,1778.54 6767.38,1898.54 6887.38,2018.54 ; 6586.84,346.67 6887.38,647.21 ; 6587.38,1658.54 6707.38,1778.54 6827.38,1898.54 6887.38,1958.54 ; 6646.84,346.67 6887.38,587.21 ; 6647.38,1658.54 6767.38,1778.54 6887.38,1898.54 ; 6706.84,346.67 6887.38,527.21 ; 6707.38,1658.54 6827.38,1778.54 6887.38,1838.54 ; 6766.84,346.67 6887.38,467.21 ; 6767.38,1658.54 6887.38,1778.54 ; 6826.84,346.67 6887.38,407.21 ; 6827.38,1658.54 6887.38,1718.54
  lines w6.01: 6719.9,-1818.5 -496.38,-1818.5 -496.38,150.5 6719.9,150.5 6719.9,-1818.11
  lines w15: 2238.61,1778.54 2648.53,1778.54 3688.24,1778.54 4548,1778.54 5197.84,1778.54 5767.7,1778.54 6887.38,1778.54 ; 2238.61,1898.54 2648.53,1898.54 3688.24,1898.54 4548,1898.54 5197.84,1898.54 5767.7,1898.54 6887.38,1898.54 ; 2238.61,2018.54 2648.53,2018.54 3688.24,2018.54 4548,2018.54 5197.84,2018.54 5767.7,2018.54 6887.38,2018.54 ; 2238.61,2138.54 2648.53,2138.54 3688.24,2138.54 4548,2138.54 5197.84,2138.54 5767.7,2138.54 6887.38,2138.54 ; 2238.61,2258.54 2648.53,2258.54 3688.24,2258.54 4548,2258.54 5197.84,2258.54 5767.7,2258.54 6887.38,2258.54 ; 2238.61,2378.54 2648.53,2378.54 3688.24,2378.54 4548,2378.54 5197.84,2378.54 5767.7,2378.54 6887.38,2378.54 ; 2238.61,2498.54 2648.53,2498.54 3688.24,2498.54 4548,2498.54 5197.84,2498.54 5767.7,2498.54 6887.38,2498.54 ; 2238.61,2618.54 2648.53,2618.54 3688.24,2618.54 4548,2618.54 5197.84,2618.54 5767.7,2618.54 6887.38,2618.54 ; 2238.61,2738.54 2648.53,2738.54 3688.24,2738.54 4548,2738.54 5197.84,2738.54 5767.7,2738.54 6887.38,2738.54 ; 2238.61,2858.54 2648.53,2858.54 3688.24,2858.54 4548,2858.54 5197.84,2858.54 5767.7,2858.54 6887.38,2858.54 ; 2238.61,2978.54 2648.53,2978.54 3688.24,2978.54 4548,2978.54 5197.84,2978.54 5767.7,2978.54 6887.38,2978.54 ; 2238.61,3098.54 2648.53,3098.54 3688.24,3098.54 4548,3098.54 5197.84,3098.54 5767.7,3098.54 6887.38,3098.54 ; 2238.61,3218.54 2648.53,3218.54 3688.24,3218.54 4548,3218.54 5197.84,3218.54 5767.7,3218.54 6887.38,3218.54 ; 2238.61,3338.54 2648.53,3338.54 3688.24,3338.54 4548,3338.54 5197.84,3338.54 5767.7,3338.54 6887.38,3338.54 ; 2238.61,3458.54 6887.38,3458.54 ; 2648.53,3578.54 2648.53,1658.54 ; 3688.24,3578.54 3688.24,1658.54 ; 4548,3578.54 4548,1658.54 ; 5197.84,3578.54 5197.84,1658.54 ; 5767.7,3578.54 5767.7,1658.54 ; 2648.53,1658.54 2238.61,1658.54 2238.61,3578.54 6887.38,3578.54 6887.38,1658.54 5767.7,1658.54 ; 2648.53,1658.54 3688.24,1658.54 ; 3688.24,1658.54 4548,1658.54 ; 4548,1658.54 5197.84,1658.54 ; 5197.84,1658.54 5767.7,1658.54 ; 2238.61,347.21 6887.38,347.21 6887.38,1628.54 2238.61,1628.54 2238.61,347.21
  text "Layer" at 2298.61,3488.54 h60
  text "Name" at 2708.53,3488.54 h60
  text "Material" at 3748.24,3488.54 h60
  text "Thickness" at 4608,3488.54 h60
  text "Constant" at 5257.84,3488.54 h60
  text "Board Layer Stack" at 5827.7,3488.54 h60
  text "1" at 2298.61,3368.54 h60
  text "Top Overlay" at 2708.53,3368.54 h60
  text "2" at 2298.61,3248.54 h60
  text "Top Solder" at 2708.53,3248.54 h60
  text "Solder Resist" at 3748.24,3248.54 h60
  text "0.40mil" at 4608,3248.54 h60
  text "3.5" at 5257.84,3248.54 h60
  text "3" at 2298.61,3128.54 h60
  text "Top Layer" at 2708.53,3128.54 h60
  text "Copper" at 3748.24,3128.54 h60
  text "1.40mil" at 4608,3128.54 h60
  text "4" at 2298.61,3008.54 h60
  text "Dielectric 1" at 2708.53,3008.54 h60
  text "FR-4" at 3748.24,3008.54 h60
  text "4.00mil" at 4608,3008.54 h60
  text "4.2" at 5257.84,3008.54 h60
  text "5" at 2298.61,2888.54 h60
  text "Signal Layer 1" at 2708.53,2888.54 h60
  text "Copper" at 3748.24,2888.54 h60
  text "0.70mil" at 4608,2888.54 h60
  text "6" at 2298.61,2768.54 h60
  text "Dielectric 3" at 2708.53,2768.54 h60
  text "9.00mil" at 4608,2768.54 h60
  text "4.2" at 5257.84,2768.54 h60
  text "7" at 2298.61,2648.54 h60
  text "Internal Plane 1" at 2708.53,2648.54 h60
  text "Copper" at 3748.24,2648.54 h60
  text "0.70mil" at 4608,2648.54 h60
  text "8" at 2298.61,2528.54 h60
  text "Dielectric 4" at 2708.53,2528.54 h60
  text "30.00mil" at 4608,2528.54 h60
  text "4.2" at 5257.84,2528.54 h60
  text "9" at 2298.61,2408.54 h60
  text "Internal Plane 2" at 2708.53,2408.54 h60
  text "Copper" at 3748.24,2408.54 h60
  text "0.70mil" at 4608,2408.54 h60
  text "10" at 2298.61,2288.54 h60
  text "Dielectric 5" at 2708.53,2288.54 h60
  text "9.00mil" at 4608,2288.54 h60
  text "4.2" at 5257.84,2288.54 h60
  text "11" at 2298.61,2168.54 h60
  text "Signal Layer 2" at 2708.53,2168.54 h60
  text "Copper" at 3748.24,2168.54 h60
  text "0.70mil" at 4608,2168.54 h60
  text "12" at 2298.61,2048.54 h60
  text "Dielectric 2" at 2708.53,2048.54 h60
  text "4.00mil" at 4608,2048.54 h60
  text "4.2" at 5257.84,2048.54 h60
  text "13" at 2298.61,1928.54 h60
  text "Bottom Layer" at 2708.53,1928.54 h60
  text "Copper" at 3748.24,1928.54 h60
  text "1.40mil" at 4608,1928.54 h60
  text "14" at 2298.61,1808.54 h60
  text "Bottom Solder" at 2708.53,1808.54 h60
  text "Solder Resist" at 3748.24,1808.54 h60
  text "0.40mil" at 4608,1808.54 h60
  text "3.5" at 5257.84,1808.54 h60
  text "15" at 2298.61,1688.54 h60
  text "Bottom Overlay" at 2708.53,1688.54 h60

## Other copper
Top Layer:
  rectangle net BOLORETURN_A: 6205.43,-1446.59 6251.44,-1335.09
  rectangle net COMB_A: 6187.44,-894.27 6244,-772.94
  text "Top Layer" at 5952.93,3129.86 h60
  text "100 Ohm - Differential" at 2385.42,1461.28 h60
  text "Top layer and Mid layer 1 - 6mil parallel traces over ground plane 1" at 2553.98,1330.79 h60
  text "Bottom layer and Mid layer 2 - 6mil parallel traces over ground plane 2" at 2553.98,1194.86 h60
  text "Mechanical layers 3 and 4" at 33.83,1191.15 h60
  text "50 Ohm - single ended" at 2369.11,1058.92 h60
  text "Define regions were no tinning must occur" at -401.04,1040.15 h60
  text "Mid layer 1 - 12mil traces" at 2581.17,901.24 h60
  text "Mid layer 2 - 12mil traces" at 2573,778.68 h60
Signal Layer 1:
  text "Mid Layer 1" at 5952.11,2881.72 h60
Signal Layer 2:
  text "Mid Layer 2" at 5924.92,2158.55 h60
Bottom Layer:
  region net BOLORETURN_B: 6251.73,-1334.85 6205.72,-1334.85 6205.72,-1446.35 6251.73,-1446.35
  rectangle net COMB_B: 6187.44,-894.27 6244,-772.94
  text "Bottom Layer" at 5969.24,1917.33 h60
Internal Plane 1 (plane layer: these items are gaps in the copper):
  text "Ground Plane 1 (Gnd)" at 5767.45,2646.62 h60
Internal Plane 2 (plane layer: these items are gaps in the copper):
  text "Ground Plane 2 (Gnd)" at 5767.45,2391.07 h60

## Silkscreen, mask and mechanical layers (free items; w line width, h text height)
Top Overlay:
  text "Top Silk" at 6050.19,3364.35 h60
  text "1" at -111.16,48 h60
  text "1" at 589.6,-591.09 h60
  text "adamjohngilbert@gmail.com" at 477.49,-1703.14 h60 r90
  text "SPT3G LC Board Rev2" at 380.62,-1704.55 h60 r90
  text "Amy Bender" at 428.35,-1707.36 h60 r90
Bottom Overlay:
  text "Bottom Silk" at 6017.56,1684.22 h60
  text "1" at 111.34,-1104.05 h60 r180
  text "adamjohngilbert@gmail.com" at -130.31,-1658.54 h60 r270
  text "SPT3G LC Board Rev2" at -33.43,-1659.94 h60 r270
  text "Amy Bender" at -81.17,-1662.75 h60 r270
  text "1" at 802.79,-1738.29 h60 r180
Mechanical 1:
  lines w6.01: 5735.97,-1719.31 cw(c5705.99,-1645.35) 5632.04,-1675.33 5632.04,-40.69 cw(c5705.99,-70.67) 5735.97,3.28 ; 5736.22,-1719.63 ccw(c5088.38,-858.01) 5736.22,3.61
Mechanical 2:
  lines w10: 1354.06,-1635.23 1374.06,-1695.23 ; 1354.06,-23.23 1374.06,36.77 ; 1364.06,-1695.23 1384.06,-1695.23 ; 1364.06,36.77 1384.06,36.77 ; 1374.06,-1105.15 1374.06,-1695.23 ; 1374.06,-553.32 1374.06,36.77 ; 1394.06,-1635.23 1374.06,-1695.23 ; 1394.06,-23.23 1374.06,36.77
  text "1732 (mil)" at 1410.05,-1095.15 h60 r90
Mechanical 3:
  rectangle: 5507.79,-1800.21 5636.45,125.06
  rectangle: 1625.6,-1799.21 1754.25,126.06
  text "NO TOP SIDE TINNING IN HIGHLIGHTED REGIONS" at 676.6,319.96 h100
Mechanical 4:
  rectangle: 5507.79,-1800.21 5636.45,125.06
  rectangle: 1625.6,-1799.21 1754.25,126.06
  text "NO BOTTOM SIDE TINNING IN HIGHLIGHTED REGIONS" at 682.22,446.49 h100

## Dimensions
-378.27,32.5 to -496.38,150.5 on Mechanical 2
6020.9,32.5 to 6719.9,150.5 on Mechanical 2
6020.9,-1699.49 to 6719.9,-1818.5 on Mechanical 2
1487.9,-1699.49 to -496.38,-1818.5 on Mechanical 2
-378.27,-1699.49 to -496.38,-1818.5 on Mechanical 2
-378.27,-1699.49 to -496.38,-1818.5 on Mechanical 2
-378.27,32.5 to -496.38,150.5 on Mechanical 2
6296.24,-151.27 to 6020.9,32.5 on Mechanical 2
-496.73,33.25 to 6020.9,32.5 on Mechanical 2
-496.38,150.5 to 6719.9,150.5 on Mechanical 2
6719.9,-1818.5 to 6719.9,150.5 on Mechanical 2
-49.21,-1133.86 to 636.77,-1783.46 on Mechanical 2
636.77,-1783.46 to -49.21,-1133.86 on Mechanical 2
1487.9,-1699.5 to 1182.05,-1783.46 on Mechanical 2